# Altium PCB Chov3.PcbDoc
Units mm, origin at the board's own origin, x right, y up, seen from the top; angles counter-clockwise.
Board outline 57 x 18 mm, 4 copper layers (Top Layer, Mid-Layer 1, Mid-Layer 2, Bottom Layer), stack 1.506 mm thick; 55 components, 41 nets, 178 pads, 44 vias.
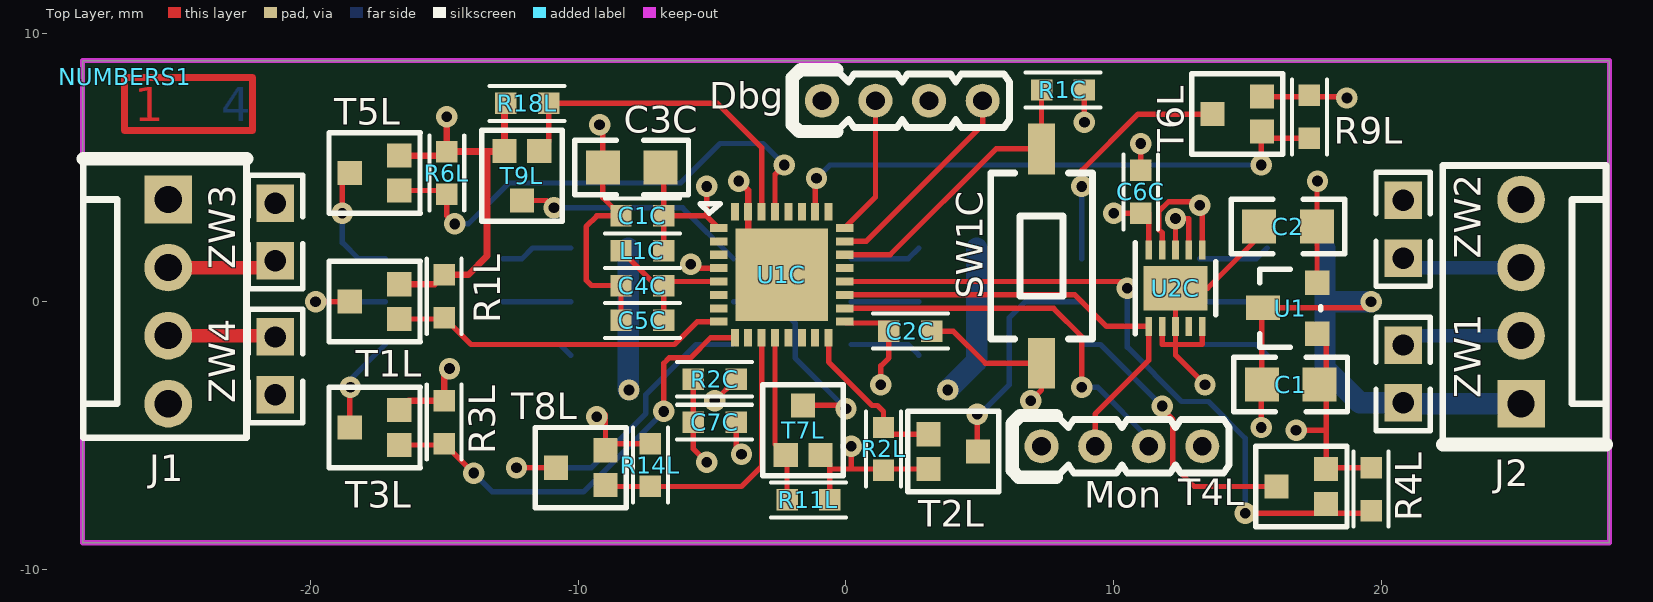
[diagram p0: Top Layer view]
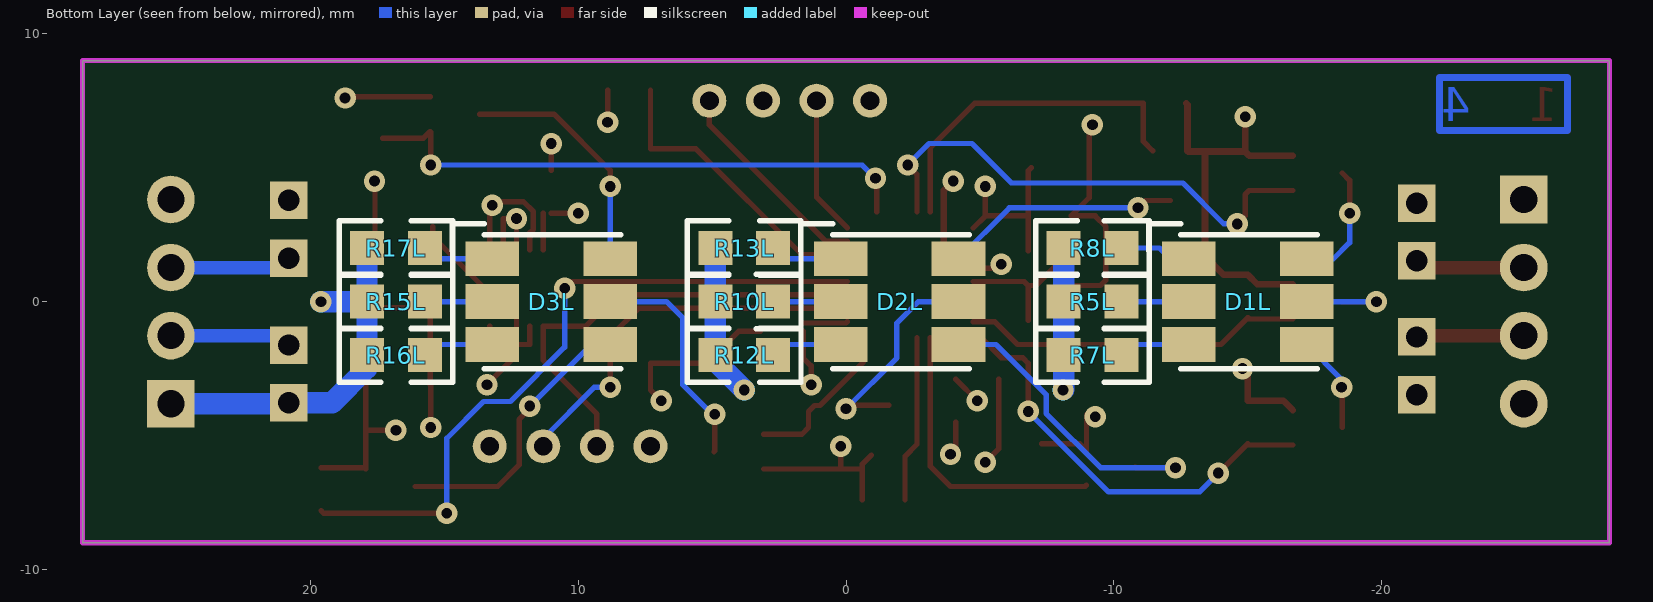
[diagram p1: Bottom Layer view, seen from below]
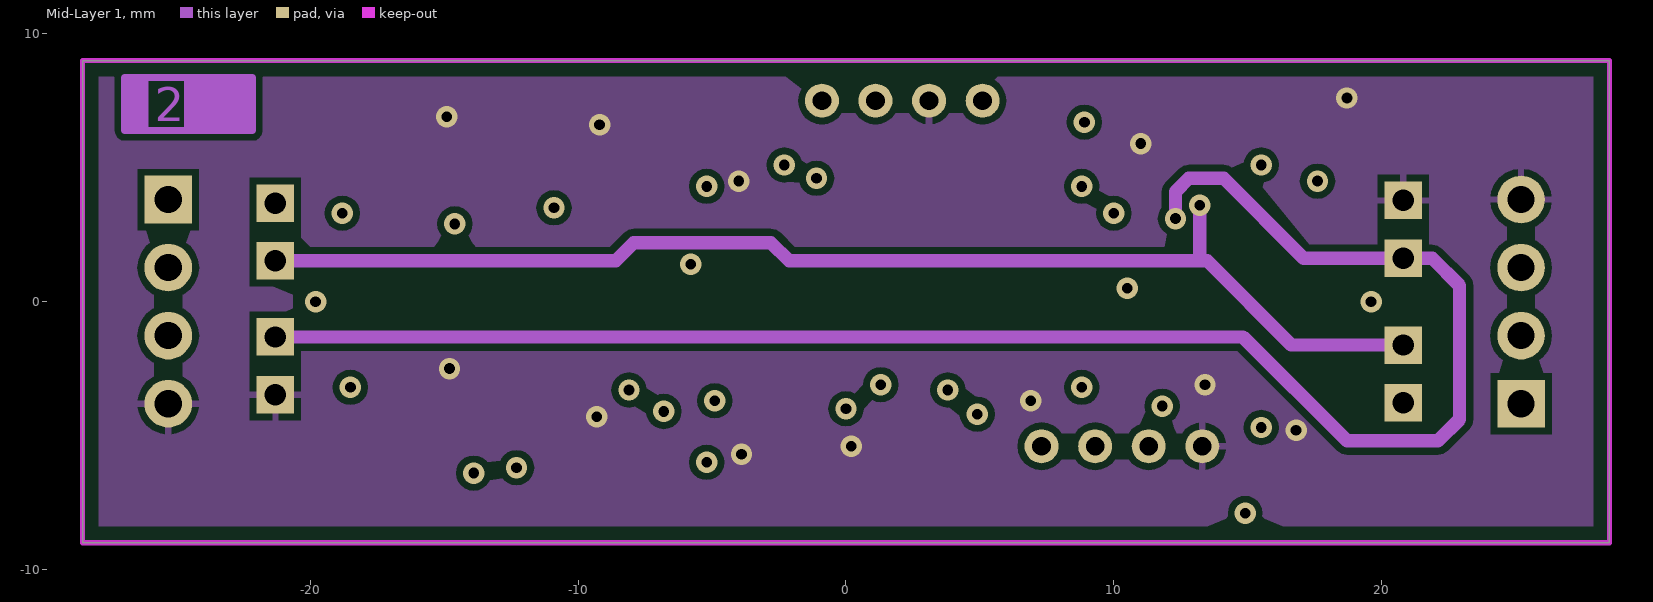
[diagram p2: Mid-Layer 1]
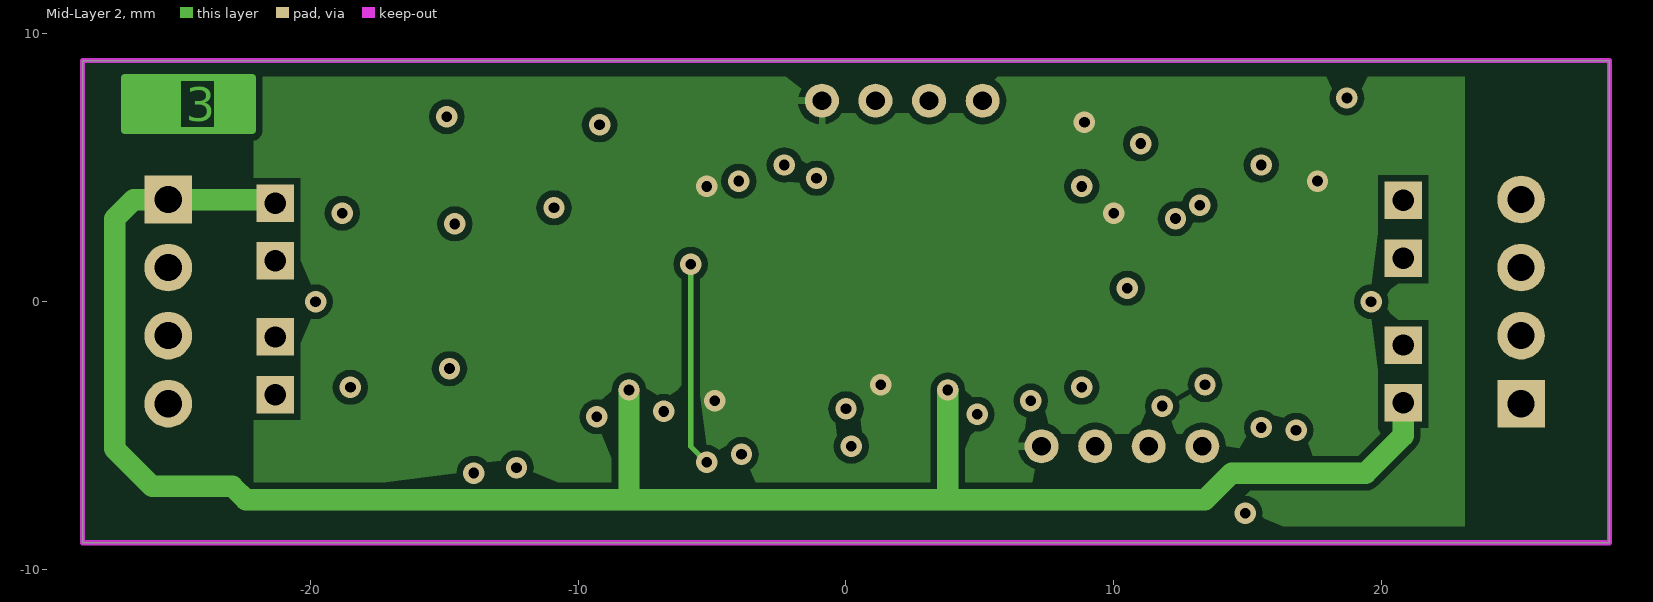
[diagram p3: Mid-Layer 2]

## Layer stack, top to bottom
Top Solder: solder mask 0.0102, Solder Resist, Dk 3.5
Top Layer: signal copper 0.035
Dielectric1: core 0.5, FR-4, Dk 4.8
Mid-Layer 1: signal copper 0.018
Dielectric2: prepreg 0.4, FR-4, Dk 4.8
Mid-Layer 2: signal copper 0.018
Dielectric3: core 0.5, FR-4, Dk 4.8
Bottom Layer: signal copper 0.035
Bottom Solder: solder mask 0.0102, Solder Resist, Dk 3.5

## Board outline
-28.5,-9 28.5,-9 28.5,9 -28.5,9

## Design rules (kind name [scope] priority, off if disabled: settings)
Clearance BoardClearance [OnCopper vs IsKeepOut] p1: gap=0.5 ignorepadtopadclearanceinfootprint=FALSE except(0: Arc-Hole Track-Hole SMDPad-Hole THPad-Hole Via-Hole Fill-Hole Poly-Hole Region-Hole Text-Hole)
Clearance InPolyClearance [InPoly] p2: gap=0.25 ignorepadtopadclearanceinfootprint=FALSE except(0: Arc-Hole Track-Hole SMDPad-Hole THPad-Hole Via-Hole Fill-Hole Poly-Hole Region-Hole Text-Hole)
Clearance ClearanceMidLayer [OnMid] p3: gap=0.152 ignorepadtopadclearanceinfootprint=FALSE except(0: Arc-Hole Track-Hole SMDPad-Hole THPad-Hole Via-Hole Fill-Hole Poly-Hole Region-Hole Text-Hole)
Clearance ClearanceOut [OnBottomLayer or OnTopLayer] p4: gap=0.127 ignorepadtopadclearanceinfootprint=FALSE except(0: Arc-Hole Track-Hole SMDPad-Hole THPad-Hole Via-Hole Fill-Hole Poly-Hole Region-Hole Text-Hole)
ComponentClearance [All] p1 off: gap=0.254 collisioncheckmode=3 verticalgap=0.254 showdistances=FALSE
Height [All] p1: minheight=0 maxheight=40 prefheight=12.7
HoleSize [All] p1: absolutevalues=TRUE maxlimit=6 minlimit=0.025 maxpercent=80.000 minpercent=20.000
MinimumSolderMaskSliver [not(IsComponentPrimitive and OnSolderMask)] p1 off: minsoldermaskwidth=0.1
PolygonConnect PolygonConnectDirect [IsVia] p1: connectstyle=Direct reliefconductorwidth=0.254 reliefentries=4 polygonreliefangle="90 Angle" airgapwidth=0.254
PolygonConnect PolygonConnectElse [All] p2: connectstyle=Relief reliefconductorwidth=0.25 reliefentries=4 polygonreliefangle="90 Angle" airgapwidth=0.254
RoutingVias [All] p1: holewidth=0.6 width=1.1 viastyle="Through Hole" minholewidth=0.3 minwidth=0.5 maxholewidth=2 maxwidth=4
SilkToSilkClearance [All] p1 off: silktosilkclearance=0.254
SilkToSolderMaskClearance SilkscreenOverComponentPads [IsPad] p1: minsilkscreentomaskgap=0.1 clearancetoexposedcopper=TRUE
SolderMaskExpansion [All] p1: expansion=0.102 istentingtop=FALSE
Width [All] p1: maxlimit=4 minlimit=0.127 preferedwidth=0.18 midlayer1_minwidth=0.152 midlayer2_minwidth=0.152 minimp=50.000000 maximp=50.000000 favimp=50.000000
24 further rules are at their usual default settings.

## Classes and differential pairs
component class Chov3_main: C1 C2 J1 J2 NUMBERS1 U1 ZW1 ZW2 ZW3 ZW4
component class CPU: C1C C2C C3C C4C C5C C6C C7C C9C Dbg L1C Mon R1C R2C R3C SW1C U1C U2C
component class LED: D1L D2L D3L R1L R2L R3L R4L R5L R6L R7L R8L R9L R10L R11L R12L R13L R14L R15L R16L R17L R18L T1L T2L T3L T4L T5L T6L T7L T8L T9L
net class CLED[8..0]: CLED0 CLED1 CLED2 CLED3 CLED4 CLED5 CLED6 CLED7 CLED8

## Components (designator, comment, footprint, x,y, rotation, side; value= is the part's Value field where it differs from the comment)
C1 "CL21B105KAFNNNG" 0805 16.6,-3.1 r0 top
C1C "CL10B104JB8NNNC" 0603-IPC -7.6,3.2 r180 top
C2 "CL21B105KAFNNNG" 0805 16.5,2.8 r180 top
C2C "CL10B104JB8NNNC" 0603-IPC 2.4,-1.1 r0 top
C3C "0805YC475KAT2A" 0805 -8,5 r180 top
C4C "CL10B105KO8NNNC" 0603-IPC -7.6,0.6 r180 top
C5C "CL10B104JB8NNNC" 0603-IPC -7.6,-0.7 r180 top
C6C "CL10B104JB8NNNC" 0603-IPC 11,4.1 r90 top
C7C "CL10B104JB8NNNC" 0603-IPC -4.9,-4.5 r0 top
D1L "OF-SMD5060RGB-W" OF-SMD5060RGB-W -15,0 r180 bottom
D2L "OF-SMD5060RGB-W" OF-SMD5060RGB-W -2,0 r180 bottom
D3L "OF-SMD5060RGB-W" OF-SMD5060RGB-W 11,0 r180 bottom
Dbg "ZL303-04P" PLMS4S -0.9,7.5 r0 top
J1 "WF04S" WF04S -25.3,0 r270 top locked
J2 "WF04S" WF04S 25.2,0 r90 top
L1C "BLM18AG102SN1D" 0603-IPC -7.6,1.9 r0 top
Mon "ZL303-04P" PLMS4S 7.3,-5.4 r0 top
NUMBERS1 "WARSTWYT_M1_M2_B" WARSTWYT_M1_M2_B -26.9,8.4 r0 top
R1C "0603SAF1003T5E" 0603-IPC 8.1,7.9 r180 top
R1L "0603SAF1003T5E" 0603-IPC -15,0.2 r270 top
R2C "0603SAF1003T5E" 0603-IPC -4.9,-2.9 r180 top
R2L "0603SAF1003T5E" 0603-IPC 1.4,-5.5 r90 top
R3L "0603SAF1003T5E" 0603-IPC -15,-4.5 r270 top
R4L "0603WGF10KT5E" 0603-IPC 19.6,-7 r270 top
R5L "0805WAF 390R T5E" 0805 -9.2,0 r0 bottom
R6L "0603SAF1003T5E" 0603-IPC -14.9,4.8 r270 top
R7L "0805WAF 390R T5E" 0805 -9.2,-2 r0 bottom
R8L "0805WAF 390R T5E" 0805 -9.2,2 r0 bottom
R9L "0603WGF10KT5E" 0603-IPC 17.3,6.9 r270 top
R10L "0805WAF 390R T5E" 0805 3.8,0 r0 bottom
R11L "0603SAF1003T5E" 0603-IPC -1.4,-7.4 r180 top
R12L "0805WAF 390R T5E" 0805 3.8,-2 r0 bottom
R13L "0805WAF 390R T5E" 0805 3.8,2 r0 bottom
R14L "0603SAF1003T5E" 0603-IPC -7.3,-6.1 r270 top
R15L "0805WAF 390R T5E" 0805 16.8,0 r0 bottom
R16L "0805WAF 390R T5E" 0805 16.8,-2 r0 bottom
R17L "0805WAF 390R T5E" 0805 16.8,2 r0 bottom
R18L "0603SAF1003T5E" 0603-IPC -11.9,7.4 r0 top
SW1C "TACTD37H25I180" TACTD37H25I180 7.3,1.7 r90 top
T1L "2N7002PW" SOT323-3_FLOW -17.6,0 r90 top
T2L "2N7002PW" SOT323-3_FLOW 4,-5.6 r270 top
T3L "2N7002PW" SOT323-3_FLOW -17.6,-4.7 r90 top
T4L "2N7002PW" SOT323-3_FLOW 17,-6.9 r90 top
T5L "2N7002PW" SOT323-3_FLOW -17.6,4.8 r90 top
T6L "2N7002PW" SOT323-3_FLOW 14.6,7 r90 top
T7L "2N7002PW" SOT323-3_FLOW -1.6,-4.8 r0 top
T8L "2N7002PW" SOT323-3_FLOW -9.9,-6.2 r90 top
T9L "2N7002PW" SOT323-3_FLOW -12.1,4.7 r180 top
U1 "APE8800-33-HF-3" SOT23-3 17.6,-1.2 r90 top
U1C "STM32F051K8U7" UFQFPN32_5x5 -2.4,1 r0 top
U2C "LTC2852CDD" MO-229WEED-2 12.3,0.5 r0 top
ZW1 "SHORT" SHORT0805 20.8,-2.7 r270 top
ZW2 "SHORT" SHORT0805 20.8,2.7 r90 top
ZW3 "SHORT" SHORT0805 -21.3,2.6 r90 top
ZW4 "SHORT" SHORT0805 -21.3,-2.4 r270 top

## Footprints (in the part's own frame and the unit in brackets; to place one, negate y for a bottom-side part, rotate by r counter-clockwise, add the part's x,y. Pads: shape width x height; smd on the part's side, far side on the other; paste and mask are expansions set on the pad)
0603-IPC [mm]
  rect 0.8x0.8 smd: 1(-0.8,0) 2(0.8,0)
  silkscreen extent -1.4,-0.65 1.4,0.65, body extent -0.8,-0.4 0.8,0.4, height 1
0805 [mil]
  rect 50x50 smd: 1(-42.5,0) 2(42.5,0)
  silkscreen extent -84,-40 84,40, body extent -39,-28 39,28, height 51
MO-229WEED-2 [mm]
  rect 0.25x0.7 smd paste-0.02 mask+0.04: 1(-1,-1.425) 2(-0.5,-1.425) 3(0,-1.425) 4(0.5,-1.425) 5(1,-1.425) 6(1,1.425) 7(0.5,1.425) 8(0,1.425) 9(-0.5,1.425) 10(-1,1.425)
  rect 2.38x1.65 smd paste-0.1 mask+0.04: 11(0,0)
  silkscreen extent -1.5,-1.7 1.5,1.7, body extent -1.5,-1.5 1.5,1.5, height 0.75
OF-SMD5060RGB-W [mm]
  rect 2x1.3 smd: 1(-2.2,1.6) 2(-2.2,0) 3(-2.2,-1.6) 4(2.2,1.6) 5(2.2,0) 6(2.2,-1.6)
  silkscreen extent -3.7,-2.5 2.6,2.9, body extent -2.9,-2.5 2.9,2.5, height 1.7
PLMS4S [mm]
  round 1.27 hole 0.7: 1(0,0) 2(2,0) 3(4,0) 4(6,0)
  silkscreen extent -1.1,-1.15 7,1.15, body extent -1,-1 7,1, height 6
SHORT0805 [mm]
  rect 1.4x1.4 hole 0.8: 1(-1.079,0) 2(1.079,0)
  silkscreen extent -2.12,-1.02 2.12,1.02, body extent -1.5,-0.4 1.5,0.4, height 0.9
SOT23-3 [mil]
  rect 36x36 smd: 1(0,0) 2(75,0)
  rect 36x50 smd: 3(38,80)
  silkscreen extent -20,-5 95,85, body extent -22,-7 97,87, height 43
SOT323-3_FLOW [mm]
  rect 0.9x0.9 smd: 1(-0.65,-0.925) 2(0.65,-0.925) 3(0,0.925)
  silkscreen extent -1.5,-1.7 1.5,1.7, body extent -1,-1 1,1, height 1.1
TACTD37H25I180 [mm]
  rect 1.9x1.016 smd: 1(-4,0) 2(4,0)
  silkscreen extent -3.1,-1.9 3.1,1.9, body extent -4,-1.85 4,1.85, height 2.5
UFQFPN32_5x5 [mm]
  rect 3.45x3.45 smd paste-0.1: 0(0,0)
  rect 0.65x0.3 smd: 1(-2.35,1.75) 2(-2.35,1.25) 3(-2.35,0.75) 4(-2.35,0.25) 5(-2.35,-0.25) 6(-2.35,-0.75) 7(-2.35,-1.25) 8(-2.35,-1.75) 17(2.35,-1.75) 18(2.35,-1.25) 19(2.35,-0.75) 20(2.35,-0.25) 21(2.35,0.25) 22(2.35,0.75) 23(2.35,1.25) 24(2.35,1.75)
  rect 0.3x0.65 smd: 9(-1.75,-2.35) 10(-1.25,-2.35) 11(-0.75,-2.35) 12(-0.25,-2.35) 13(0.25,-2.35) 14(0.75,-2.35) 15(1.25,-2.35) 16(1.75,-2.35) 25(1.75,2.35) 26(1.25,2.35) 27(0.75,2.35) 28(0.25,2.35) 29(-0.25,2.35) 30(-0.75,2.35) 31(-1.25,2.35) 32(-1.75,2.35)
  silkscreen extent -3.05,2.3 -2.3,2.65, body extent -2.5,-2.5 2.5,2.5, height 1
WARSTWYT_M1_M2_B [mm]
  Top Layer lines w0.254: -0.027,-2.014 -0.027,-0.033 4.748,-0.033 4.748,-2.014 -0.027,-2.014
  Mid-Layer 1 lines w0.254: 0.125,-2.014 0.125,-0.033 ; 0.278,-2.014 0.278,-0.033 ; 0.532,-2.014 0.532,-0.033 ; 0.736,-0.033 0.736,-2.014 -0.027,-2.014 ; 2.31,-2.014 2.31,-0.033 ; 2.31,-1.507 4.748,-1.507 ; 2.31,-1.304 4.748,-1.304 ; 2.31,-1.101 4.748,-1.101 ; 2.31,-0.898 4.748,-0.898 ; 2.31,-0.694 4.748,-0.694 ; 2.31,-0.49 4.748,-0.49 ; 2.31,-0.287 4.748,-0.287 ; 2.351,-1.85 4.751,-1.85 ; 2.36,-1.71 4.748,-1.71 ; -0.027,-2.014 4.748,-2.014 4.748,-0.033 -0.027,-0.033 -0.027,-2.014
  Mid-Layer 2 lines w0.254: -0.027,-1.862 1.954,-1.862 ; -0.027,-1.659 1.954,-1.659 ; -0.027,-1.456 1.954,-1.456 ; -0.027,-1.252 1.954,-1.252 ; -0.027,-1.049 1.954,-1.049 ; -0.027,-0.846 1.954,-0.846 ; -0.027,-0.643 1.954,-0.643 ; -0.027,-0.44 1.954,-0.44 ; -0.027,-0.236 1.954,-0.236 ; 1.954,-2.014 1.954,-0.033 ; 3.427,-2.014 3.427,-0.033 ; 3.58,-2.014 3.58,-0.033 ; 3.732,-2.014 3.732,-0.033 ; 3.935,-2.014 3.935,-0.033 ; 4.138,-2.014 4.138,-0.033 ; 4.342,-2.014 4.342,-0.033 ; 4.545,-2.014 4.545,-0.033 ; -0.027,-2.014 -0.027,-0.033 4.748,-0.033 4.748,-2.014 -0.027,-2.014
  Bottom Layer lines w0.254: -0.027,-2.014 -0.027,-0.033 4.748,-0.033 4.748,-2.014 -0.027,-2.014
WF04S [mil]
  rect 70x70 hole 40: 1(-150,0)
  round 70 hole 40: 2(-50,0) 3(50,0) 4(150,0)
  silkscreen extent -210,-125 200,115, body extent -200,-125 200,115, height 453

## Part data
C1 C2: library part CL21B105KAFNNNG[[/\]]0805[[/\]]25V[[/\]]10%[[/\]]1u/25
C1C C2C C5C C6C C7C: library part CL10B104JB8NNNC[[/\]]0603[[/\]]50V[[/\]]10%[[/\]]100n/50
C3C: library part 0805YC475KAT2A[[/\]]0805[[/\]]16V[[/\]]10%[[/\]]4u7/16
C4C: library part CL10B105KO8NNNC[[/\]]0603[[/\]]16V[[/\]]10%[[/\]]1u/16
D1L D2L D3L: library part OF-SMD5060RGB-W[[/\]]5060
Dbg Mon: library part ZL303-04P[[/\]]4x2mm
J1 J2: library part WF04S[[/\]]WF04S
L1C: library part BLM18AG102SN1D[[/\]]0603[[/\]]BLM18AG102SN1D
NUMBERS1: library part NUMBERSLAYERS_T_M1_M2_B
R1C R1L R2C R2L R3L R6L R11L R14L R18L: library part 0603SAF1003T5E[[/\]]0603[[/\]]0.1W[[/\]]1%[[/\]]100k
R4L R9L: library part 0603WGF10KT5E[[/\]]0603[[/\]]0.1W[[/\]]1%[[/\]]10k
R5L R7L R8L R10L R12L R13L R15L R16L R17L: library part "0805WAF 390R T5E[[/\]]0805[[/\]]0.125W[[/\]]1%[[/\]]390R"
SW1C: library part TACTD37H25I180[[/\]]3.7x6.1x2.5
T1L T2L T3L T4L T5L T6L T7L T8L T9L: library part 2N7002PW[[/\]]SOT323-3
U1: library part APE8800-33-HF-3[[/\]]SOT23-3
U1C: library part STM32F051K8U7[[/\]]UFQFPN32_5x5
U2C: library part LTC2852CDD[[/\]]MO-229WEED-2
ZW1 ZW2 ZW3 ZW4: library part SHORT[[/\]]SHORT[[/\]]0[[/\]]1%[[/\]]SHORT0805

## Via types
v1: diameter 0.8, hole 0.4, Top Layer to Bottom Layer, 44 vias

## Nets (pads, with @x,y where several pads share a name; then routed paths per layer and width w, separated by ;. In a path a pad name is that pad's centre, name@x,y a point inside that pad or via, vN(x,y) a via of type N, cw(c..) or ccw(c..) an arc to the next point about the centre after c; other vN are vias at no path point)
+3V3: C1C.1 C2.1 C2C.1 C3C.1 C6C.1 Dbg.1 L1C.2 Mon.1 R1C.1 R2C.1 U1.2 U1C.1 U1C.17 U2C.10 | length 18.8
  Top Layer w0.2: C3C.1 -6.8,4.88 C1C.1 ; L1C.2 C1C.1 ; v1(-5.2,4.3) -5.2,3.2 ; v1(-4.9,-3.7) R2C.1 ; U1C.1 -5.2,3.2 ; U1C.17 0,-0.8 C2C.1@1.6,-0.8 ; v1(1.3,-3.1) 1.3,-2.4 1.6,-2.1 C2C.1 ; v1(8.9,6.7) R1C.1 ; v1(10,3.3) C6C.1 ; U2C.10 C6C.1@11.3,3.3 ; U1.2 17.58,0.726 C2.1 17.58,4.48 v1(17.6,4.5) ; C1C.1 -5.2,3.2
+5V: C1.1 J1.1 J2.1 R5L.2 R7L.2 R8L.2 R10L.2 R12L.2 R13L.2 R15L.2 R16L.2 R17L.2 U1.3 ZW1.2 ZW3.2 | length 108
  Top Layer w0.2: v1(15.5,-4.7) 15.5,-3.12 C1.1 15.52,-0.282 U1.3 19.365,-0.235 v1(19.6,0)
  Mid-Layer 2 w0.8: ZW3.2 -21.43,3.81 J1.1 -26.59,3.81 -27.3,3.1 -27.3,-5.5 -25.9,-6.9 -22.9,-6.9 -22.4,-7.4 -8.1,-7.4 ; v1@-8.1,-3.3 -8.1,-7.4 ; v1(3.8,-3.3) 3.8,-7.4 ; ZW1.2 20.8,-5 19.4,-6.4 14.4,-6.4 13.4,-7.4 3.8,-7.4 ; -8.1,-7.4 3.8,-7.4
  Bottom Layer w0.8: R8L.2 R5L.2 R7L.2 -8.121,-3.279 v1(-8.1,-3.3) ; v1(3.8,-3.3) 4.879,-2.221 R12L.2 R13L.2 ; R17L.2 R15L.2 ; v1(19.6,0) R15L.2 ; J2.1 20.83,-3.81 ZW1.2 19.179,-3.779 17.879,-2.479 R16L.2 R15L.2
APLUS: J1.2 J2.2 U2C.6 U2C.9 ZW1.1 ZW3.1 | length 59.6
  Top Layer w0.2: U2C.9 11.8,2.573 11.673,2.7 11.673,3.36 12.04,3.727 13.073,3.727 v1(13.2,3.6) 13.3,3.5 U2C.6
  Top Layer w0.5: J1.2 -21.55,1.27 ZW3.1
  Mid-Layer 1 w0.5: ZW3.1 -8.6,1.52 -7.918,2.202 -2.802,2.202 -2.12,1.52 13.2,1.52 ; v1(13.2,3.6) 13.2,1.52 ; ZW1.1 16.621,-1.62 13.48,1.52 13.2,1.52
  Bottom Layer w0.5: ZW1.1 21.151,-1.27 J2.2
BMINUS: J1.3 J2.3 U2C.7 U2C.8 ZW2.1 ZW4.1 | length 76
  Top Layer w0.2: U2C.8 v1(12.3,3.1) 12.8,3.1 U2C.7
  Top Layer w0.5: J1.3 -21.351,-1.27 ZW4.1
  Mid-Layer 1 w0.5: ZW4.1 14.821,-1.321 18.7,-5.2 22.1,-5.2 22.9,-4.4 22.9,0.6 21.88,1.62 ZW2.1 17.08,1.62 14.1,4.6 12.8,4.6 12.3,4.1 v1(12.3,3.1)
  Bottom Layer w0.5: ZW2.1 21.15,1.27 J2.3
CLED0: R1L.2 T1L.1 U1C.8 | length 12.7
  Top Layer w0.2: T1L.1 -15.05,-0.65 R1L.2 -14,-1.6 -6.4,-1.6 -5.55,-0.75 U1C.8
CLED1: R3L.2 T3L.1 U1C.9 | length 16.7
  Top Layer w0.2: T3L.1 R3L.2@-15.05,-5.35 ; R3L.2 v1(-13.9,-6.4) ; v1(-6.8,-4.1) -6.8,-2.3 -6.6,-2.1 -5.8,-2.1 -5.05,-1.35 U1C.9
  Bottom Layer w0.2: v1(-13.9,-6.4) -13.2,-7.1 -9.8,-7.1 v1(-6.8,-4.1)
CLED2: R6L.2 T5L.1 U1C.29 | length 18.8
  Top Layer w0.2: T5L.1 -15.05,4.15 R6L.2 -14.9,3.2 v1(-14.6,2.9) ; U1C.29 -2.65,4.75 v1(-2.3,5.1)
  Bottom Layer w0.2: v1(-14.6,2.9) -14.1,2.9 -12.573,4.427 -6.173,4.427 -4.7,5.9 -3.1,5.9 v1(-2.3,5.1)
CLED3: R11L.2 T7L.1 U1C.12 | length 6.2
  Top Layer w0.2: U1C.12 -2.65,-5.325 -2.2,-5.775 R11L.2
CLED4: R14L.2 T8L.1 U1C.11 | length 11
  Top Layer w0.2: T8L.1 -8.925,-6.9 R14L.2 -3.9,-6.9 -3.15,-6.15 U1C.11
CLED5: R18L.2 T9L.1 U1C.30 | length 13
  Top Layer w0.2: T9L.1 -11.1,5.975 R18L.2 -4.8,7.4 -3.15,5.75 U1C.30
CLED6: R2L.2 T2L.1 U1C.16 | length 6.1
  Top Layer w0.2: U1C.16 -0.65,-2.249 0.978,-3.877 1.177,-3.877 1.4,-4.1 R2L.2 1.65,-4.95 T2L.1
CLED7: R4L.2 T4L.1 U1C.20 | length 26.2
  Top Layer w0.2: U1C.20 10.25,0.75 v1(10.5,0.5) ; v1(14.9,-7.9) 19.5,-7.9 R4L.2
  Bottom Layer w0.2: v1(10.5,0.5) 10.5,-1.7 12.527,-3.727 13.527,-3.727 14.9,-5.1 v1(14.9,-7.9)
CLED8: R9L.2 T6L.1 U1C.26 | length 21.2
  Top Layer w0.2: U1C.26 -1.15,4.55 v1(-1.1,4.6) ; v1(15.5,5.1) 15.5,6.325 T6L.1 15.775,6.1 R9L.2
  Bottom Layer w0.2: v1(-1.1,4.6) -0.6,5.1 v1(15.5,5.1)
GND: C1.2 C1C.2 C2.2 C2C.2 C3C.2 C4C.2 C5C.2 C6C.2 C7C.2 Dbg.3 J1.4 J2.4 Mon.4 R1L.1 R2L.1 R3L.1 R4L.1 R6L.1 R9L.1 R11L.1 R14L.1 R18L.1 SW1C.1 T1L.2 T2L.2 T3L.2 T4L.2 T5L.2 T6L.2 T7L.2 T8L.2 T9L.2 U1.1 U1C.0 U1C.31 U2C.2 U2C.3 U2C.5 U2C.11 ZW2.2 ZW4.2 | length 70.7
  Top Layer w0.2: v1(-9.3,-4.3) -9.1,-4.3 -9,-4.2 -8.975,-4.225 T8L.2 -8.725,-5.3 R14L.1 ; v1(-9.2,6.6) -9.2,6.5 -9.079,6.379 C3C.2 -9.079,3.879 C1C.2 -9.3,3.2 -9.7,2.8 -9.7,0.8 -9.5,0.6 C4C.2 C5C.2 ; C7C.2 -4.1,-5.5 v1(-3.9,-5.7) ; T7L.2 -0.6,-6.075 R11L.1 ; -0.55,-6.25 0.2,-6.25 ; v1(0.2,-5.4) 0.2,-6.25 ; T2L.2 0.2,-6.25 ; C2C.2 4,-1.1 5.2,-2.3 SW1C.1 7.3,-3.3 v1(6.9,-3.7) ; C6C.2 v1(11,5.9) ; U2C.2 11.8,-1.6 12.3,-1.6 ; U2C.5 13.3,-1.6 12.3,-1.6 ; v1(13.4,-3.1) 12.3,-2 12.3,-1.6 ; C2.2 15.421,2.421 13.5,0.5 U2C.11 U2C.3 12.3,-1.6 ; T6L.2 18.65,7.65 v1(18.7,7.6) ; v1(16.8,-4.8) 17.925,-4.8 ; U1.1 17.925,-1.525 17.925,-4.8 ; R4L.1 17.975,-6.2 T4L.2 17.925,-4.8
  Top Layer w0.25: T3L.2 -16.325,-3.7 R3L.1 -15,-2.7 v1(-14.8,-2.5) ; T1L.2 -15.35,0.65 R1L.1 -14.1,1 -13.4,1.7 -13.4,5.6 ; T5L.2 -15.05,5.45 R6L.1 ; v1(-14.9,6.9) R6L.1 ; R18L.1 -12.75,7.35 T9L.2 -12.775,5.6 -13.4,5.6 ; v1(-4,4.5) -3.65,4.15 U1C.31 U1C.0@-3.65,2.25 ; R6L.1 -13.4,5.6
KEY0: R1C.2 SW1C.2 U1C.22 | length 11.2
  Top Layer w0.2: U1C.22 1.65,1.75 5.6,5.7 SW1C.2 R1C.2
LEDC0: D1L.5 T1L.3 | length 3.9
  Top Layer w0.2: v1(-19.8,0) T1L.3
  Bottom Layer w0.2: v1(-19.8,0) D1L.5
LEDC1: D1L.6 T3L.3 | length 3.6
  Top Layer w0.2: T3L.3 -18.525,-3.225 v1(-18.5,-3.2)
  Bottom Layer w0.2: v1(-18.5,-3.2) -18.5,-2.9 D1L.6
LEDC2: D1L.4 T5L.3 | length 4.6
  Top Layer w0.2: v1(-18.8,3.3) -18.8,4.525 T5L.3
  Bottom Layer w0.2: v1(-18.8,3.3) -18.8,2.2 -18.2,1.6 D1L.4
LEDC3: D2L.5 T7L.3 | length 8.3
  Top Layer w0.2: T7L.3 -0.125,-3.875 v1(0,-4)
  Bottom Layer w0.2: D2L.5 -2.7,0 -1.9,-0.8 -1.9,-2.1 v1(0,-4)
LEDC4: D2L.6 T8L.3 | length 11.9
  Top Layer w0.2: v1(-12.3,-6.2) T8L.3 T8L.3@-10.8,-6.175
  Bottom Layer w0.2: v1(-12.3,-6.2) -9.5,-6.2 -7.473,-4.173 -7.473,-3.473 -5.6,-1.6 D2L.6
LEDC5: D2L.4 T9L.3 | length 8.8
  Top Layer w0.2: T9L.3 -11.175,3.775 v1(-10.9,3.5)
  Bottom Layer w0.2: v1(-10.9,3.5) -6.1,3.5 D2L.4
LEDC6: D3L.5 T2L.3 | length 8.5
  Top Layer w0.2: v1(4.9,-4.2) 4.9,-5.575 T2L.3
  Bottom Layer w0.2: v1(4.9,-4.2) 5,-4.2 6.1,-3.1 6.1,-0.6 6.7,0 D3L.5
LEDC7: D3L.6 T4L.3 | length 10.5
  Top Layer w0.2: v1@11.8,-4 12.2,-4.4 12.2,-6.1 13,-6.9 T4L.3
  Mid-Layer 1 w0.25: v1@11.8,-4 v1(11.8,-3.9)
  Bottom Layer w0.2: D3L.6 9.5,-1.6 v1(11.8,-3.9)
LEDC8: D3L.4 T6L.3 | length 9
  Top Layer w0.2: v1(8.8,4.3) 8.8,4.9 10.9,7 T6L.3
  Bottom Layer w0.2: D3L.4 v1(8.8,4.3)
NetC4C_1: C4C.1 C5C.1 L1C.1 U1C.5 | length 5.6
  Top Layer w0.2: L1C.1 -7.1,0.6 C4C.1 ; C5C.1 C4C.1 ; U1C.5 -6.65,0.75 C4C.1
NetD1L_1: D1L.1 R8L.1 | length 2.7
  Bottom Layer w0.2: D1L.1 -12.1,1.6 -11.7,2 R8L.1
NetD1L_2: D1L.2 R5L.1 | length 2.5
  Bottom Layer w0.2: D1L.2 R5L.1
NetD1L_3: D1L.3 R7L.1 | length 2.7
  Bottom Layer w0.2: D1L.3 -10.68,-1.6 R7L.1
NetD2L_1: D2L.1 R13L.1 | length 2.7
  Bottom Layer w0.2: D2L.1 2.32,1.6 R13L.1
NetD2L_2: D2L.2 R10L.1 | length 2.5
  Bottom Layer w0.2: D2L.2 R10L.1
NetD2L_3: D2L.3 R12L.1 | length 2.7
  Bottom Layer w0.2: D2L.3 2.32,-1.6 R12L.1
NetD3L_1: D3L.1 R17L.1 | length 2.7
  Bottom Layer w0.2: D3L.1 15.32,1.6 R17L.1
NetD3L_2: D3L.2 R15L.1 | length 2.5
  Bottom Layer w0.2: D3L.2 R15L.1
NetD3L_3: D3L.3 R16L.1 | length 2.7
  Bottom Layer w0.2: D3L.3 15.32,-1.6 R16L.1
NRST: C7C.1 R2C.2 U1C.4 | length 12.1
  Top Layer w0.2: v1(-5.8,1.4) -5.65,1.25 U1C.4 ; R2C.2 C7C.1 -5.7,-5.5 v1(-5.2,-6)
  Mid-Layer 2 w0.2: v1(-5.8,1.4) -5.8,-5.4 v1(-5.2,-6)
OSC_IN: U1C.2
OSC_OUT: U1C.3
RXD: Mon.2 U1C.19 U2C.1 | length 17.1
  Top Layer w0.2: U1C.19 8.55,0.25 9.725,-0.925 U2C.1 11.3,-2.2 9.3,-4.2 Mon.2
SWCLK: Dbg.2 U1C.24 | length 5.2
  Top Layer w0.2: U1C.24 1.1,3.9 Dbg.2
SWDIO: Dbg.4 U1C.23 | length 7.9
  Top Layer w0.2: U1C.23 0.75,2.25 5.1,6.6 Dbg.4
TXD: Mon.3 U1C.18 | length 14.8
  Top Layer w0.2: U1C.18 7.75,-0.25 8.8,-1.3 v1(8.8,-3.2)
  Bottom Layer w0.2: v1(8.8,-3.2) 9.4,-3.2 11.3,-5.1 Mon.3
pads on no net: U1C.6 U1C.7 U1C.10 U1C.13 U1C.14 U1C.15 U1C.21 U1C.25 U1C.27 U1C.28 U1C.32 U2C.4

## Polygon pours and split planes (outlines as drawn)
GND on Mid-Layer 1 "GNDMid1" (solid, remove dead copper, pour order 1000): -28.5,9 28.5,9 28.5,-9 -28.5,-9
+3V3 on Mid-Layer 2 "+3V3Mid1" (solid, remove dead copper, pour order 1001): -22.1,9 -22.1,-9 23.1,-9 23.1,8.9 23,9

## Keep-outs
Keep-Out Layer:
  the board outline again, w0.2

## Silkscreen, mask and mechanical layers (free items; w line width, h text height)
Obrys:
  the board outline again, w0.2

## Dimensions
28.5,-9 to 28.5,9 on Dims
-28.5,-9 to 28.5,-9 on Dims

## Text inside footprints (layer, text, board x,y; h text height)
NUMBERS1: Top Layer "1" at -26.572,6.741 h1.27; Bottom Layer "4" at -23.32,6.741 h1.27; Mid-Layer 2 "3" at -24.641,6.741 h1.27; Mid-Layer 1 "2" at -25.81,6.741 h1.27